# Altium PCB ServoController.PcbDoc
Units mm, origin at the board's own origin, x right, y up, seen from the top; angles counter-clockwise.
Board outline 83.19 x 69.85 mm, 2 copper layers (Top Layer, Bottom Layer); 18 components, 54 nets, 204 pads, 7 vias.
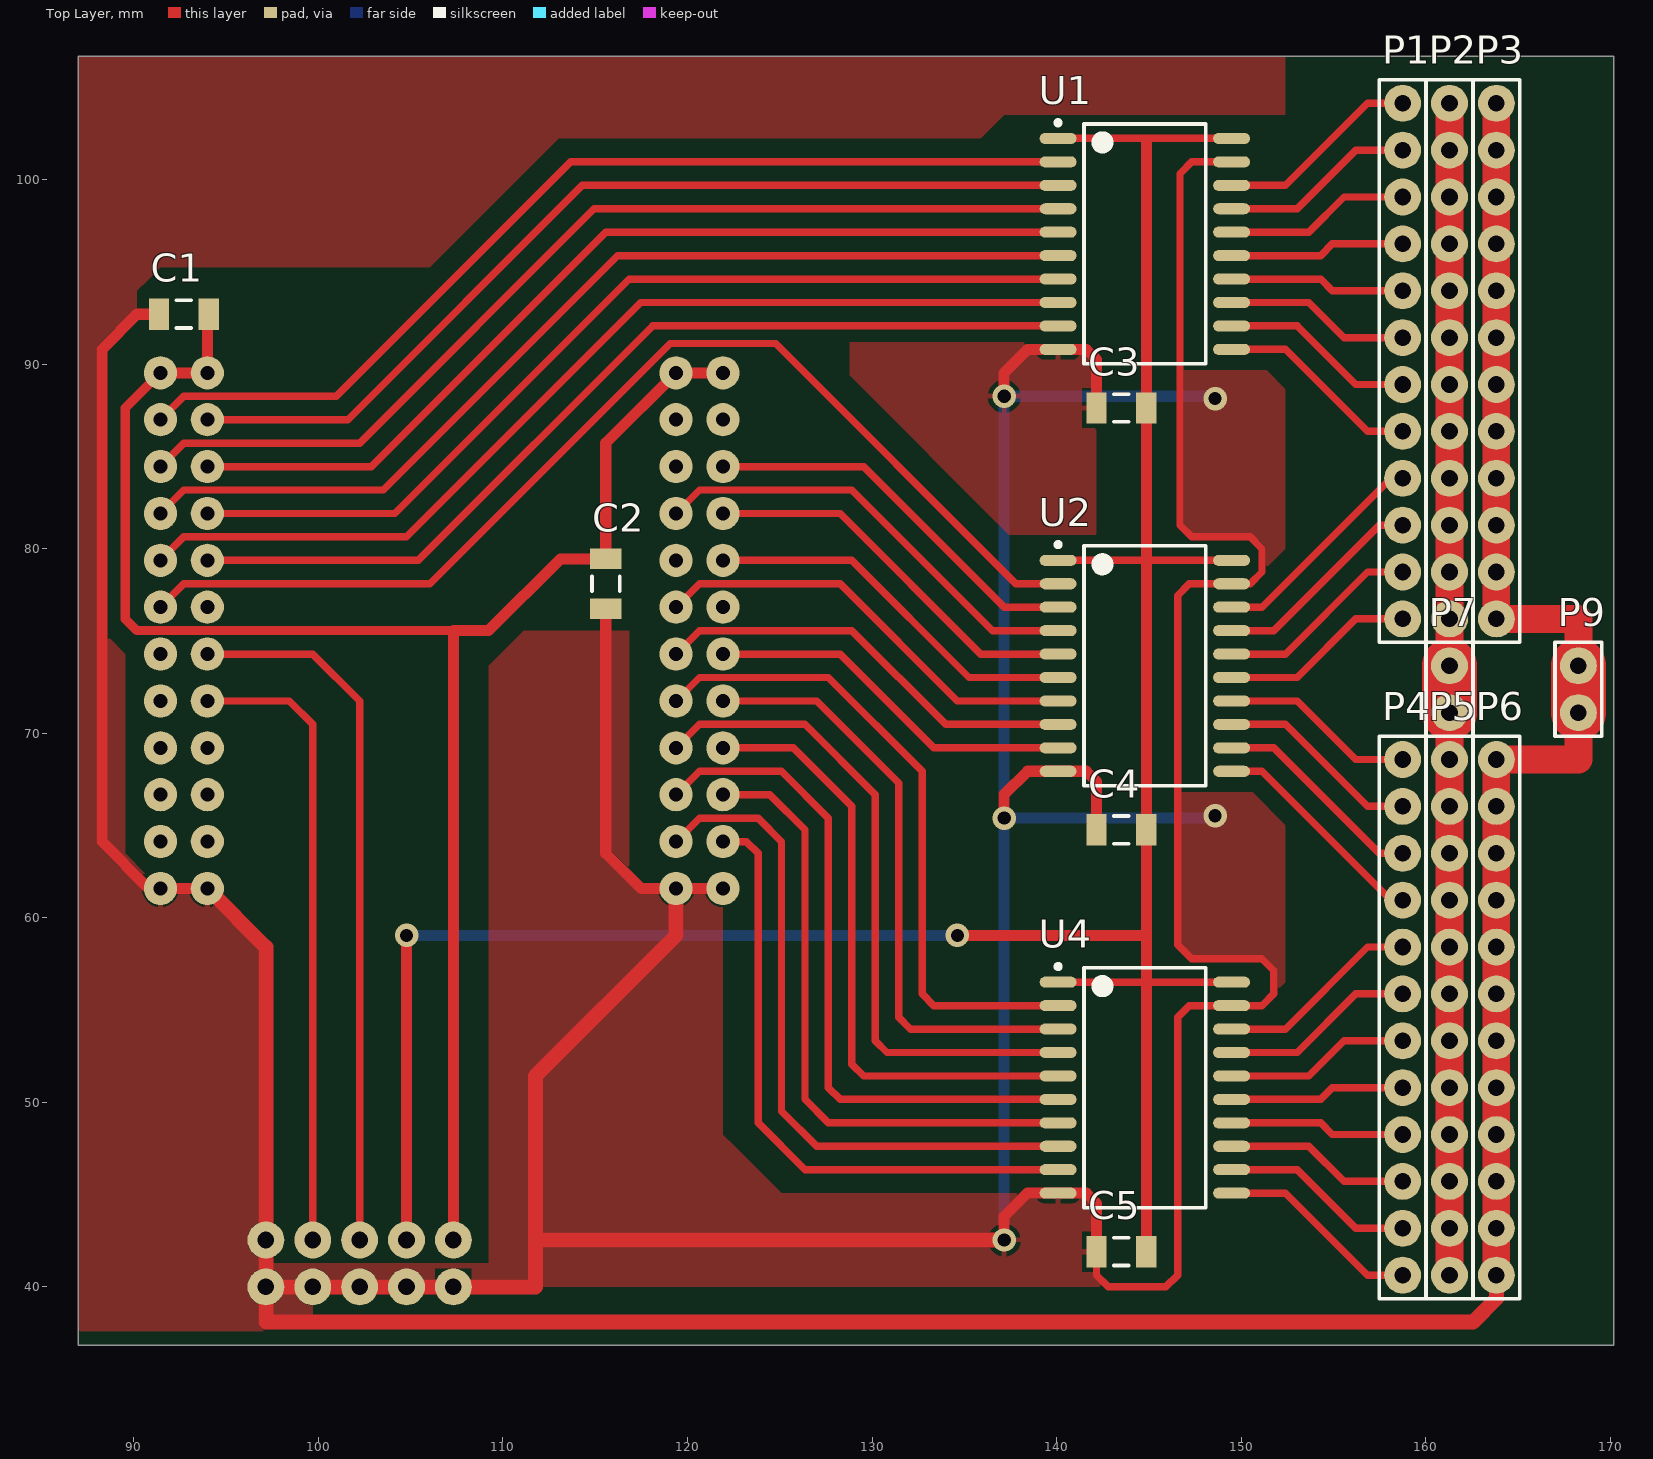
[diagram p0: Top Layer view]
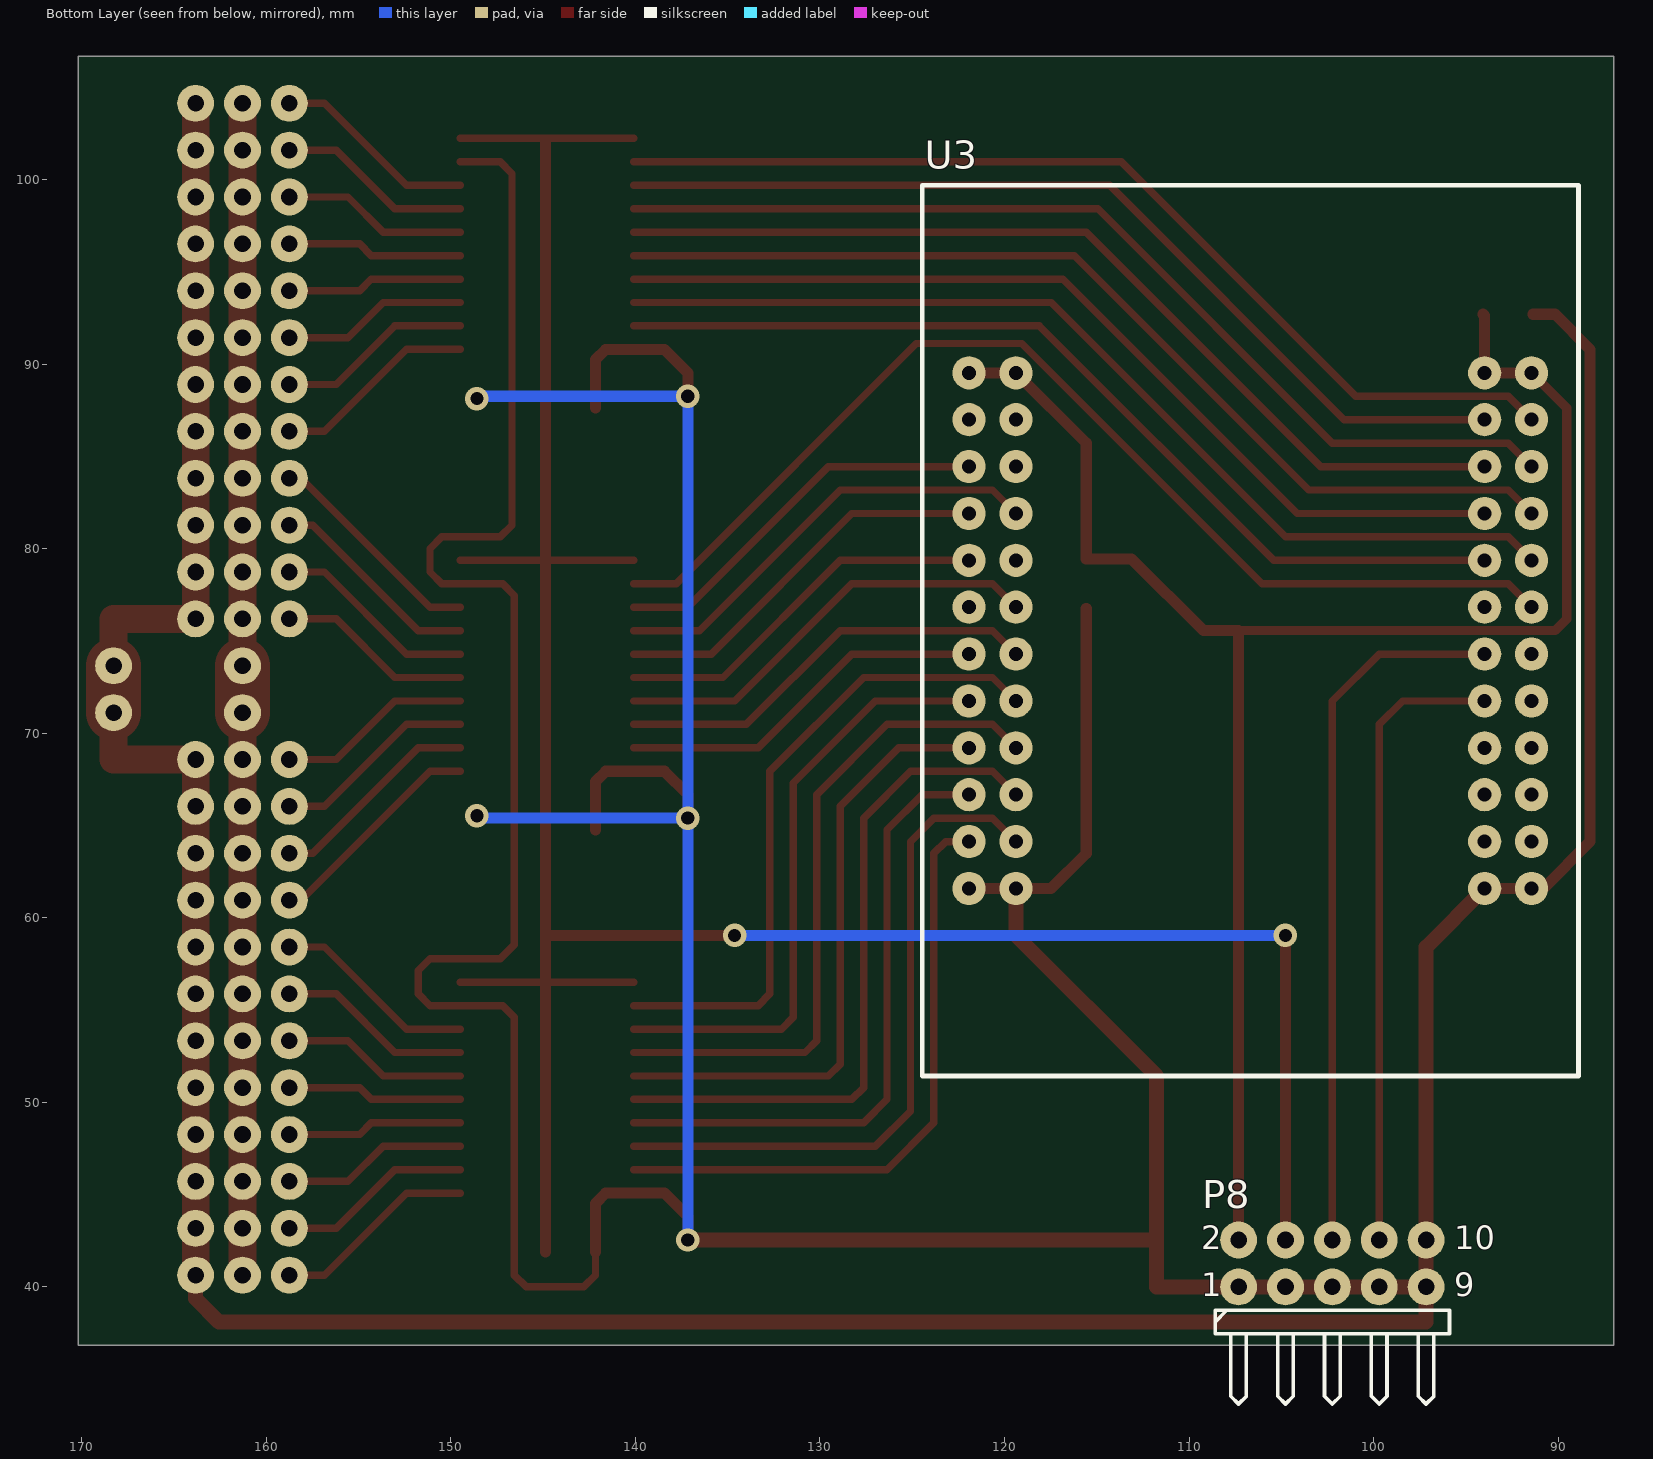
[diagram p1: Bottom Layer view, seen from below]

## Layer stack, top to bottom
Top Solder: solder mask 0.0102, Solder Resist, Dk 3.5
Top Layer: signal copper 0.0356
Dielectric 1: dielectric 0.32, FR-4, Dk 4.8
Bottom Layer: signal copper 0.0356
Bottom Solder: solder mask 0.0102, Solder Resist, Dk 3.5

## Board outline
86.995,36.83 86.995,106.68 170.18,106.68 170.18,36.83

## Design rules (kind name [scope] priority, off if disabled: settings)
Clearance [All] p1: gap=0
ComponentClearance [All] p1: gap=0 collisioncheckmode=3 verticalgap=0 showdistances=FALSE
PolygonConnect [All] p1: connectstyle=Relief reliefconductorwidth=0.254 reliefentries=4 polygonreliefangle="90 Angle" airgapwidth=0.254
RoutingVias [All] p1: holewidth=0.711 width=1.27 viastyle="Through Hole" minholewidth=0.711 minwidth=1.27 maxholewidth=0.711 maxwidth=1.27
SolderMaskExpansion [All] p1: expansion=0.102
Width [All] p1: maxlimit=10 minlimit=0.1 preferedwidth=0.254
29 further rules are at their usual default settings.

## Components (designator, comment, footprint, x,y, rotation, side; value= is the part's Value field where it differs from the comment)
C1 "Cap Semi" C1206 92.71,92.71 r0 top
C2 "Cap Semi" C1206 115.57,78.105 r90 top
C3 "Cap Semi" C1206 143.51,87.63 r0 top
C4 "Cap Semi" C1206 143.51,64.77 r0 top
C5 "Cap Semi" C1206 143.51,41.91 r0 top
P1 "Header 12" HDR1X12 158.75,104.14 r270 top
P2 "Header 12" HDR1X12 161.29,76.2 r90 top
P3 "Header 12" HDR1X12 163.83,76.2 r90 top
P4 "Header 12" HDR1X12 158.75,68.58 r270 top
P5 "Header 12" HDR1X12 161.29,40.64 r90 top
P6 "Header 12" HDR1X12 163.83,40.64 r90 top
P7 "Header 2" HDR1X2 161.29,73.66 r270 top
P8 "Header 5X2H" HDR2X5H 107.315,40.005 r180 bottom
P9 "Header 2" HDR1X2 168.275,73.66 r270 top
U1 "MC74HCT245ADW" 751D-05_N 144.78,96.52 r0 top
U2 "MC74HCT245ADW" 751D-05_N 144.78,73.66 r0 top
U3 "STM32F103C8T6_Module" STM32F103C8T6_Module 106.68,76.835 r180 bottom
U4 "MC74HCT245ADW" 751D-05_N 144.78,50.8 r0 top

## Footprints (in the part's own frame and the unit in brackets; to place one, negate y for a bottom-side part, rotate by r counter-clockwise, add the part's x,y. Pads: shape width x height; smd on the part's side, far side on the other; paste and mask are expansions set on the pad)
751D-05_N [mm] "SOIC, 20-Leads, Body 12.8x7.5mm, Pitch 1.27mm, IPC Medium Density"
  oval 2x0.6 smd: 1(-4.7,5.715) 2(-4.7,4.445) 3(-4.7,3.175) 4(-4.7,1.905) 5(-4.7,0.635) 6(-4.7,-0.635) 7(-4.7,-1.905) 8(-4.7,-3.175) 9(-4.7,-4.445) 10(-4.7,-5.715) 11(4.7,-5.715) 12(4.7,-4.445) 13(4.7,-3.175) 14(4.7,-1.905) 15(4.7,-0.635) 16(4.7,0.635) 17(4.7,1.905) 18(4.7,3.175) 19(4.7,4.445) 20(4.7,5.715)
  silkscreen extent -4.82,-6.5 3.3,6.69, body extent -3.8,-6.5 3.8,6.5, height 2.65
C1206 [mm] "Chip Capacitor, Body 3.2x1.6mm, IPC High Density"
  rect 1.1x1.7 smd: 1(-1.35,0) 2(1.35,0)
  silkscreen extent -0.4,-0.75 0.4,0.75, body extent -1.7,-0.9 1.7,0.9, height 1.3
HDR1X2 [mm] "Connector; Header; 2 Position"
  round 2 hole 0.9: 1(0,0) 2(2.54,0)
  silkscreen extent -1.27,-1.27 3.81,1.27
HDR1X12 [mm] "Connector; Header; 12 Position"
  round 2 hole 0.9: 1(0,0) 2(2.54,0) 3(5.08,0) 4(7.62,0) 5(10.16,0) 6(12.7,0) 7(15.24,0) 8(17.78,0) 9(20.32,0) 10(22.86,0) 11(25.4,0) 12(27.94,0)
  silkscreen extent -1.27,-1.27 29.21,1.27
HDR2X5H [mm] "Connector; Header; 5x2 Position; Right Angle"
  round 2 hole 0.9: 1(0,0) 2(0,2.54) 3(2.54,0) 4(2.54,2.54) 5(5.08,0) 6(5.08,2.54) 7(7.62,0) 8(7.62,2.54) 9(10.16,0) 10(10.16,2.54)
  silkscreen extent -1.27,-6.35 11.43,-1.27
STM32F103C8T6_Module [mm]
  round 1.8 hole 0.762: 1(15.24,12.7) 2(12.7,12.7) 3(15.24,10.16) 4(12.7,10.16) 5(15.24,7.62) 6(12.7,7.62) 7(15.24,5.08) 8(12.7,5.08) 9(15.24,2.54) 10(12.7,2.54) 11(15.24,0) 12(12.7,0) 13(15.24,-2.54) 14(12.7,-2.54) 15(15.24,-5.08) 16(12.7,-5.08) 17(15.24,-7.62) 18(12.7,-7.62) 19(15.24,-10.16) 20(12.7,-10.16) 21(15.24,-12.7) 22(12.7,-12.7) 23(15.24,-15.24) 24(12.7,-15.24) 25(-12.7,12.7) 26(-15.24,12.7) 27(-12.7,10.16) 28(-15.24,10.16) 29(-12.7,7.62) 30(-15.24,7.62) 31(-12.7,5.08) 32(-15.24,5.08) 33(-12.7,2.54) 34(-15.24,2.54) 35(-12.7,0) 36(-15.24,0) 37(-12.7,-2.54) 38(-15.24,-2.54) 39(-12.7,-5.08) 40(-15.24,-5.08) 41(-12.7,-7.62) 42(-15.24,-7.62) 43(-12.7,-10.16) 44(-15.24,-10.16) 45(-12.7,-12.7) 46(-15.24,-12.7) 47(-12.7,-15.24) 48(-15.24,-15.24)
  silkscreen extent -17.78,-25.4 17.78,22.86

## Part data
C1 C2 C3 C4 C5: "Capacitor (Semiconductor SIM Model)"
P1 P2 P3 P4 P5 P6: "Header, 12-Pin"
P7 P9: "Header, 2-Pin"
P8: "Header, 5-Pin, Dual row, Right Angle"
U1 U2 U4: "Octal 3-State Non-Inverting Bus Transceiver with LSTTL-Compatible Inputs"

## Via types
v1: diameter 1.27, hole 0.711, Top Layer to Bottom Layer, 7 vias

## Nets (pads, with @x,y where several pads share a name; then routed paths per layer and width w, separated by ;. In a path a pad name is that pad's centre, name@x,y a point inside that pad or via, vN(x,y) a via of type N, cw(c..) or ccw(c..) an arc to the next point about the centre after c; other vN are vias at no path point)
3.3V: C1.2 C2.2 P8.2 U3.1 U3.2 U3.25 U3.26 | length 95
  Top Layer w0.5: U3.1 89.535,87.63 89.535,76.2 90.17,75.565 107.315,75.565
  Top Layer w0.6: U3.1 U3.2 93.98,92.63 C1.2 ; P8.2 107.315,75.565 109.22,75.565 113.11,79.455 C2.2 115.57,85.725 U3.25 U3.26
5V: C3.2 C4.2 C5.2 P8.4 U1.1 U1.20 U2.1 U2.20 U4.1 U4.20 | length 145
  Top Layer w0.4: U4.1 144.86,56.515 U4.20 ; U2.1 144.86,79.375 U2.20 ; U1.1 U1.20
  Top Layer w0.6: P8.4 v1(104.775,59.055) ; v1(134.62,59.055) 144.86,59.055 ; C5.2 144.86,56.515 144.86,59.055 ; 144.86,102.155 C3.2 144.86,79.375 C4.2 144.86,59.055
  Bottom Layer w0.6: v1(104.775,59.055) v1(134.62,59.055)
GND: C1.1 C2.1 C3.1 C4.1 C5.1 P3.1 P3.2 P3.3 P3.4 P3.5 P3.6 P3.7 P3.8 P3.9 P3.10 P3.11 P3.12 P6.1 P6.2 P6.3 P6.4 P6.5 P6.6 P6.7 P6.8 P6.9 P6.10 P6.11 P6.12 P8.1 P8.3 P8.5 P8.7 P8.9 P8.10 P9.1 P9.2 U1.10 U1.19 U2.10 U2.19 U3.23 U3.24 U3.47 U3.48 U4.10 U4.19 | length 470.6
  Top Layer w0.4: C5.1 142.16,40.64 142.795,40.005 145.922,40.005 146.557,40.64 146.557,54.61 147.192,55.245 U4.19 151.13,55.245 151.765,55.88 151.765,57.15 151.13,57.785 147.32,57.785 146.557,58.548 146.557,77.47 147.192,78.105 U2.19@149.353,78.105 ; U2.19 150.495,78.105 151.13,78.74 151.13,80.01 150.495,80.645 147.32,80.645 146.685,81.28 146.685,100.33 147.32,100.965 U1.19
  Top Layer w0.6: C1.1 90.17,92.71 88.265,90.805 88.265,64.135 90.805,61.595 U3.23 U3.24 ; C2.1 115.57,63.5 117.475,61.595 U3.47 U3.48 ; v1(137.16,42.545) 137.16,43.815 138.43,45.085 U4.10 141.605,45.085 142.16,44.53 C5.1 ; v1(137.16,65.405) 137.16,66.675 138.43,67.945 U2.10 141.605,67.945 142.16,67.39 C4.1 ; v1(137.16,88.265) 137.16,89.535 138.43,90.805 U1.10 141.605,90.805 142.16,90.25 C3.1
  Top Layer w0.8: U3.24 97.155,58.42 P8.10 P8.9 ; U3.47 119.38,59.055 111.76,51.435 111.76,42.545 ; v1(137.16,42.545) 111.76,42.545 ; P6.1 163.83,39.37 162.56,38.1 97.155,38.1 P8.9 ; P8.9 P8.7 P8.5 P8.3 P8.1 111.76,40.005 111.76,42.545
  Top Layer w1.5: P6.1 P6.2 P6.3 P6.4 P6.5 P6.6 P6.7 P6.8 P6.9 P6.10 P6.11 P6.12 168.275,68.58 P9.2 ; P3.12 P3.11 P3.10 P3.9 P3.8 P3.7 P3.6 P3.5 P3.4 P3.3 P3.2 P3.1 168.275,76.2 P9.1
  Top Layer w3: P9.2 P9.1
  Bottom Layer w0.6: v1(137.16,42.545) v1(137.16,65.405) ; v1@148.463,65.405 v1(137.16,65.405) ; v1@148.463,88.265 v1(137.16,88.265) v1(137.16,65.405)
  other v1: 148.59,65.532 148.59,88.138
NetP1_1: P1.1 U1.18 | length 11.1
  Top Layer w0.4: U1.18 152.4,99.695 156.845,104.14 P1.1
NetP1_2: P1.2 U1.17 | length 10.6
  Top Layer w0.4: U1.17 153.035,98.425 156.21,101.6 P1.2
NetP1_3: P1.3 U1.16 | length 10.1
  Top Layer w0.4: U1.16 153.67,97.155 155.575,99.06 P1.3
NetP1_4: P1.4 U1.15 | length 9.5
  Top Layer w0.4: U1.15 154.305,95.885 154.94,96.52 P1.4
NetP1_5: P1.5 U1.14 | length 9.5
  Top Layer w0.4: U1.14 154.305,94.615 154.94,93.98 P1.5
NetP1_6: P1.6 U1.13 | length 10.1
  Top Layer w0.4: U1.13 153.67,93.345 155.575,91.44 P1.6
NetP1_7: P1.7 U1.12 | length 10.6
  Top Layer w0.4: U1.12 153.035,92.075 156.21,88.9 P1.7
NetP1_8: P1.8 U1.11 | length 11.1
  Top Layer w0.4: U1.11 152.4,90.805 156.845,86.36 P1.8
NetP1_9: P1.9 U2.18 | length 11.5
  Top Layer w0.4: U2.18 151.13,76.835 P1.9@158.115,83.82
NetP1_10: P1.10 U2.17 | length 11.6
  Top Layer w0.4: U2.17 151.765,75.565 157.48,81.28 P1.10
NetP1_11: P1.11 U2.16 | length 11.1
  Top Layer w0.4: U2.16 152.4,74.295 156.845,78.74 P1.11
NetP1_12: P1.12 U2.15 | length 10.6
  Top Layer w0.4: U2.15 153.035,73.025 156.21,76.2 P1.12
NetP4_1: P4.1 U2.14 | length 10.6
  Top Layer w0.4: U2.14 153.035,71.755 156.21,68.58 P4.1
NetP4_2: P4.2 U2.13 | length 11.1
  Top Layer w0.4: U2.13 152.4,70.485 156.845,66.04 P4.2
NetP4_3: P4.3 U2.12 | length 11.6
  Top Layer w0.4: U2.12 151.765,69.215 157.48,63.5 P4.3
NetP4_4: P4.4 U2.11 | length 12.2
  Top Layer w0.4: U2.11 151.13,67.945 158.115,60.96 P4.4
NetP4_5: P4.5 U4.18 | length 11.1
  Top Layer w0.4: U4.18 152.4,53.975 156.845,58.42 P4.5
NetP4_6: P4.6 U4.17 | length 10.6
  Top Layer w0.4: U4.17 153.035,52.705 156.21,55.88 P4.6
NetP4_7: P4.7 U4.16 | length 10.1
  Top Layer w0.4: U4.16 153.67,51.435 155.575,53.34 P4.7
NetP4_8: P4.8 U4.15 | length 9.5
  Top Layer w0.4: U4.15 154.305,50.165 154.94,50.8 P4.8
NetP4_9: P4.9 U4.14 | length 9.5
  Top Layer w0.4: U4.14 154.305,48.895 154.94,48.26 P4.9
NetP4_10: P4.10 U4.13 | length 10.1
  Top Layer w0.4: U4.13 153.67,47.625 155.575,45.72 P4.10
NetP4_11: P4.11 U4.12 | length 10.6
  Top Layer w0.4: U4.12 153.035,46.355 156.21,43.18 P4.11
NetP4_12: P4.12 U4.11 | length 11.1
  Top Layer w0.4: U4.11 152.4,45.085 156.845,40.64 P4.12
NetU1_2: U1.2 U3.3 | length 54.4
  Top Layer w0.4: U3.3 92.71,88.265 100.965,88.265 113.665,100.965 U1.2
NetU1_3: U1.3 U3.4 | length 51.4
  Top Layer w0.4: U3.4 101.6,86.995 114.3,99.695 U1.3
NetU1_4: U1.4 U3.5 | length 54.4
  Top Layer w0.4: U3.5 92.71,85.725 102.235,85.725 114.935,98.425 U1.4
NetU1_5: U1.5 U3.6 | length 51.4
  Top Layer w0.4: U3.6 102.87,84.455 115.57,97.155 U1.5
NetU1_6: U1.6 U3.7 | length 54.4
  Top Layer w0.4: U3.7 92.71,83.185 103.505,83.185 116.205,95.885 U1.6
NetU1_7: U1.7 U3.8 | length 51.4
  Top Layer w0.4: U3.8 104.14,81.915 116.84,94.615 U1.7
NetU1_8: U1.8 U3.9 | length 54.4
  Top Layer w0.4: U3.9 92.71,80.645 104.775,80.645 117.475,93.345 U1.8
NetU1_9: U1.9 U3.10 | length 51.4
  Top Layer w0.4: U3.10 105.41,79.375 118.11,92.075 U1.9
NetU2_2: U2.2 U3.11 | length 60
  Top Layer w0.4: U3.11 92.71,78.105 106.045,78.105 119.062,91.123 124.777,91.123 137.795,78.105 U2.2
NetU2_3: U2.3 U3.30 | length 21.3
  Top Layer w0.4: U3.30 129.54,84.455 137.16,76.835 U2.3
NetU2_4: U2.4 U3.31 | length 24.4
  Top Layer w0.4: U3.31 120.65,83.185 128.905,83.185 136.525,75.565 U2.4
NetU2_5: U2.5 U3.32 | length 21.3
  Top Layer w0.4: U3.32 128.27,81.915 135.89,74.295 U2.5
NetU2_6: U2.6 U3.34 | length 20.8
  Top Layer w0.4: U3.34 128.905,79.375 135.255,73.025 U2.6
NetU2_7: U2.7 U3.35 | length 23.9
  Top Layer w0.4: U3.35 120.65,78.105 128.27,78.105 134.62,71.755 U2.7
NetU2_8: U2.8 U3.37 | length 23.3
  Top Layer w0.4: U3.37 120.65,75.565 128.905,75.565 133.985,70.485 U2.8
NetU2_9: U2.9 U3.38 | length 20.3
  Top Layer w0.4: U3.38 128.27,74.295 133.35,69.215 U2.9
NetU3_39: U3.39 U4.2 | length 35.7
  Top Layer w0.4: U3.39 120.65,73.025 127.635,73.025 132.715,67.945 132.715,55.88 133.35,55.245 U4.2
NetU3_40: U3.40 U4.3 | length 33
  Top Layer w0.4: U3.40 127,71.755 131.445,67.31 131.445,54.61 132.08,53.975 U4.3
NetU3_41: U3.41 U4.4 | length 36.4
  Top Layer w0.4: U3.41 120.65,70.485 126.365,70.485 130.175,66.675 130.175,53.34 130.81,52.705 U4.4
NetU3_42: U3.42 U4.5 | length 33.7
  Top Layer w0.4: U3.42 125.73,69.215 128.905,66.04 128.905,52.07 129.54,51.435 U4.5
NetU3_43: U3.43 U4.6 | length 37.1
  Top Layer w0.4: U3.43 120.65,67.945 125.095,67.945 127.635,65.405 127.635,50.8 128.27,50.165 U4.6
NetU3_44: U3.44 U4.7 | length 34.1
  Top Layer w0.4: U3.44 124.46,66.675 126.365,64.77 126.365,50.165 127.635,48.895 U4.7
NetU3_45: U3.45 U4.8 | length 37.1
  Top Layer w0.4: U3.45 120.65,65.405 123.825,65.405 125.095,64.135 125.095,49.53 127,47.625 U4.8
NetU3_46: U3.46 U4.9 | length 34.1
  Top Layer w0.4: U3.46 123.19,64.135 123.825,63.5 123.825,48.895 126.365,46.355 U4.9
RX: P8.8 U3.16 | length 34.2
  Top Layer w0.4: U3.16 98.425,71.755 99.695,70.485 P8.8
TX: P8.6 U3.14 | length 38.5
  Top Layer w0.4: U3.14 99.695,74.295 102.235,71.755 P8.6
VBAT_SERVO: P2.1 P2.2 P2.3 P2.4 P2.5 P2.6 P2.7 P2.8 P2.9 P2.10 P2.11 P2.12 P5.1 P5.2 P5.3 P5.4 P5.5 P5.6 P5.7 P5.8 P5.9 P5.10 P5.11 P5.12 P7.1 P7.2 | length 63.5
  Top Layer w1.5: P5.1 P5.2 P5.3 P5.4 P5.5 P5.6 P5.7 P5.8 P5.9 P5.10 P5.11 P5.12 P7.2 ; P7.1 P2.1 P2.2 P2.3 P2.4 P2.5 P2.6 P2.7 P2.8 P2.9 P2.10 P2.11 P2.12
  Top Layer w3: P7.2 P7.1
pads on no net: U3.12 U3.13 U3.15 U3.17 U3.18 U3.19 U3.20 U3.21 U3.22 U3.27 U3.28 U3.29 U3.33 U3.36

## Polygon pours and split planes (outlines as drawn)
GND on Top Layer "Top Layer-No Net" (solid, pour order 6): 128.778,91.186 141.224,91.186 142.16,90.25 142.16,90.17 142.16,80.852 142.24,80.772 137.414,80.772 128.778,89.408
GND on Top Layer "Top Layer-No Net" (solid, pour order 8): 146.685,89.662 150.876,89.662 151.384,89.662 152.4,88.646 152.4,80.01 151.13,78.74 151.13,80.01 150.622,80.518 150.495,80.645 147.32,80.645 146.685,81.28
GND on Top Layer "Top Layer-No Net" (solid, pour order 10): 146.557,66.802 150.622,66.802 152.4,65.024 152.4,56.642 152.4,56.515 151.765,55.88 151.765,57.15 151.13,57.785 147.32,57.785 146.557,58.548
GND on Top Layer "Top Layer-No Net" (solid, pour order 4): 152.4,103.505 152.4,106.68 86.995,106.68 86.995,37.582 87.122,37.592 99.695,37.592 99.695,40.005 135.255,40.005 142.875,40.005 142.2,40.68 142.2,42.926 142.2,44.49 141.605,45.085 125.095,45.085 122.555,47.625 121.92,48.26 121.92,61.595 117.475,61.595 116.84,62.23 116.84,75.565 111.125,75.565 109.22,73.66 109.22,46.355 109.22,41.275 97.155,41.275 97.155,58.42 93.98,61.595 91.44,61.595 89.535,63.5 89.535,73.66 89.535,74.295 88.265,75.565 88.265,90.805 90.17,92.71 90.17,93.98 90.805,94.615 91.44,95.25 106.045,95.25 113.03,102.235 128.905,102.235 135.89,102.235 137.16,103.505

## Text inside footprints (layer, text, board x,y; h text height)
P8: Bottom Overlay "2" at 109.347,42.037 h1.27; Bottom Overlay "1" at 109.347,39.497 h1.27; Bottom Overlay "9" at 95.631,39.497 h1.27; Bottom Overlay "10" at 95.631,42.037 h1.27